# Altium PCB MotorPID.PcbDoc
Units mm, origin at the board's own origin, x right, y up, seen from the top; angles counter-clockwise.
Board outline 120.07 x 68.44 mm, 2 copper layers (Top Layer, Bottom Layer), stack 1.571 mm thick; 18 components, 15 nets, 88 pads, 13 vias.
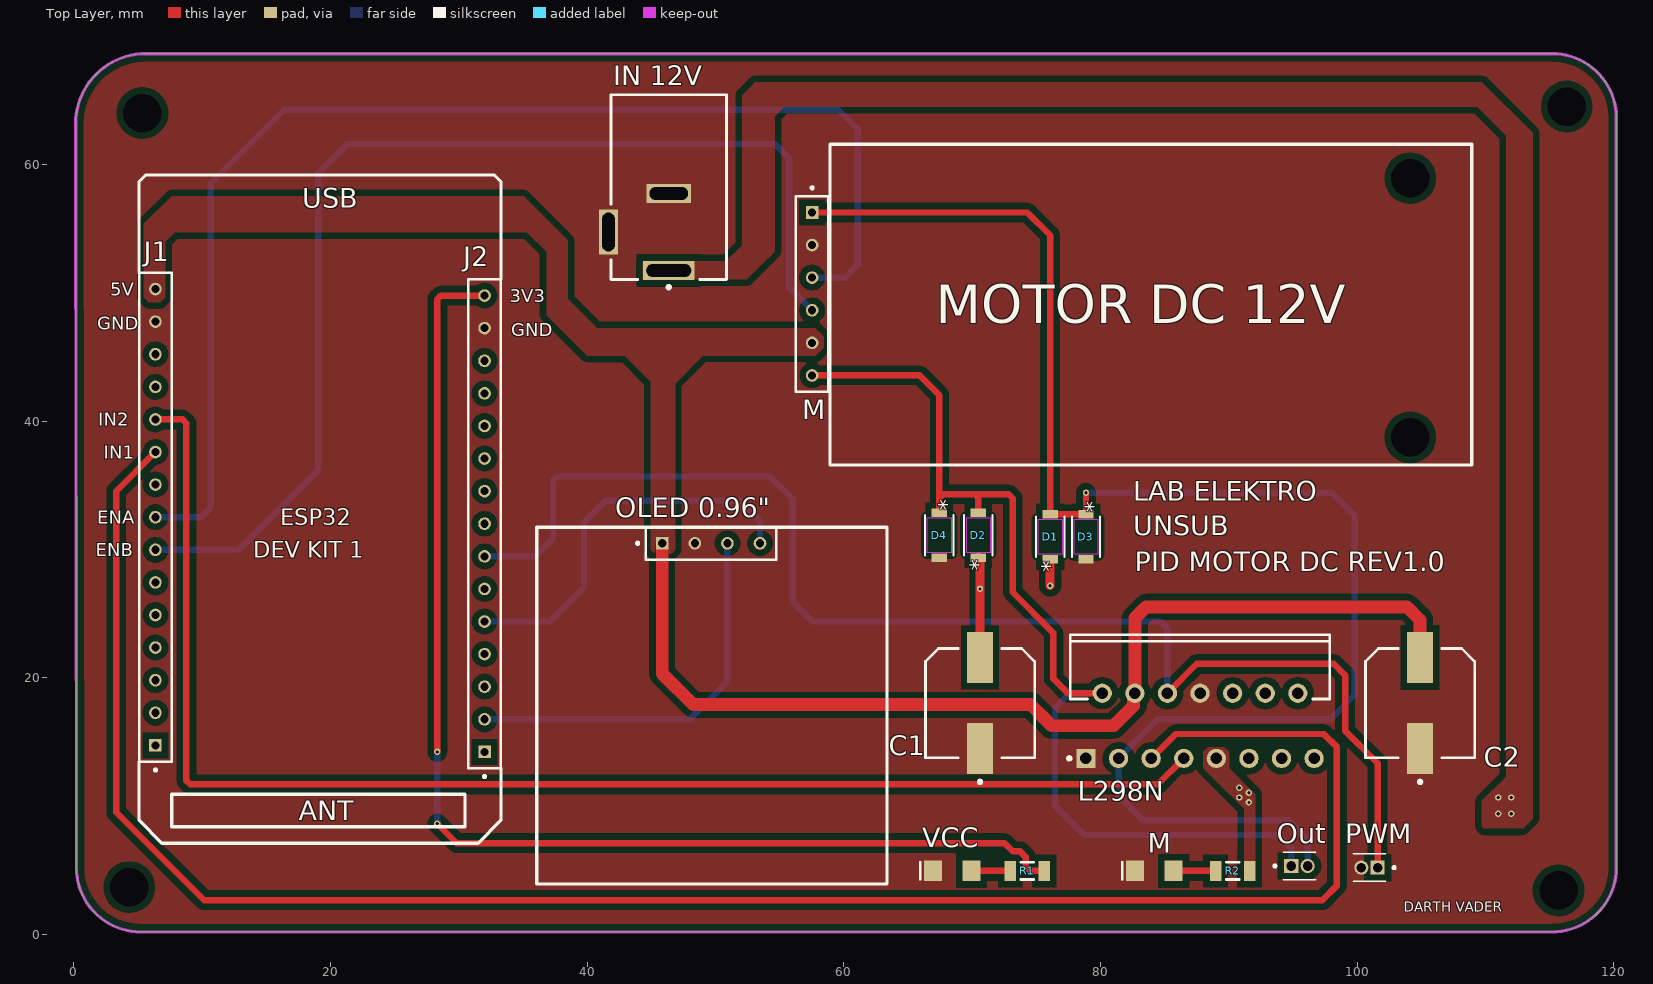
[diagram p0: Top Layer view]
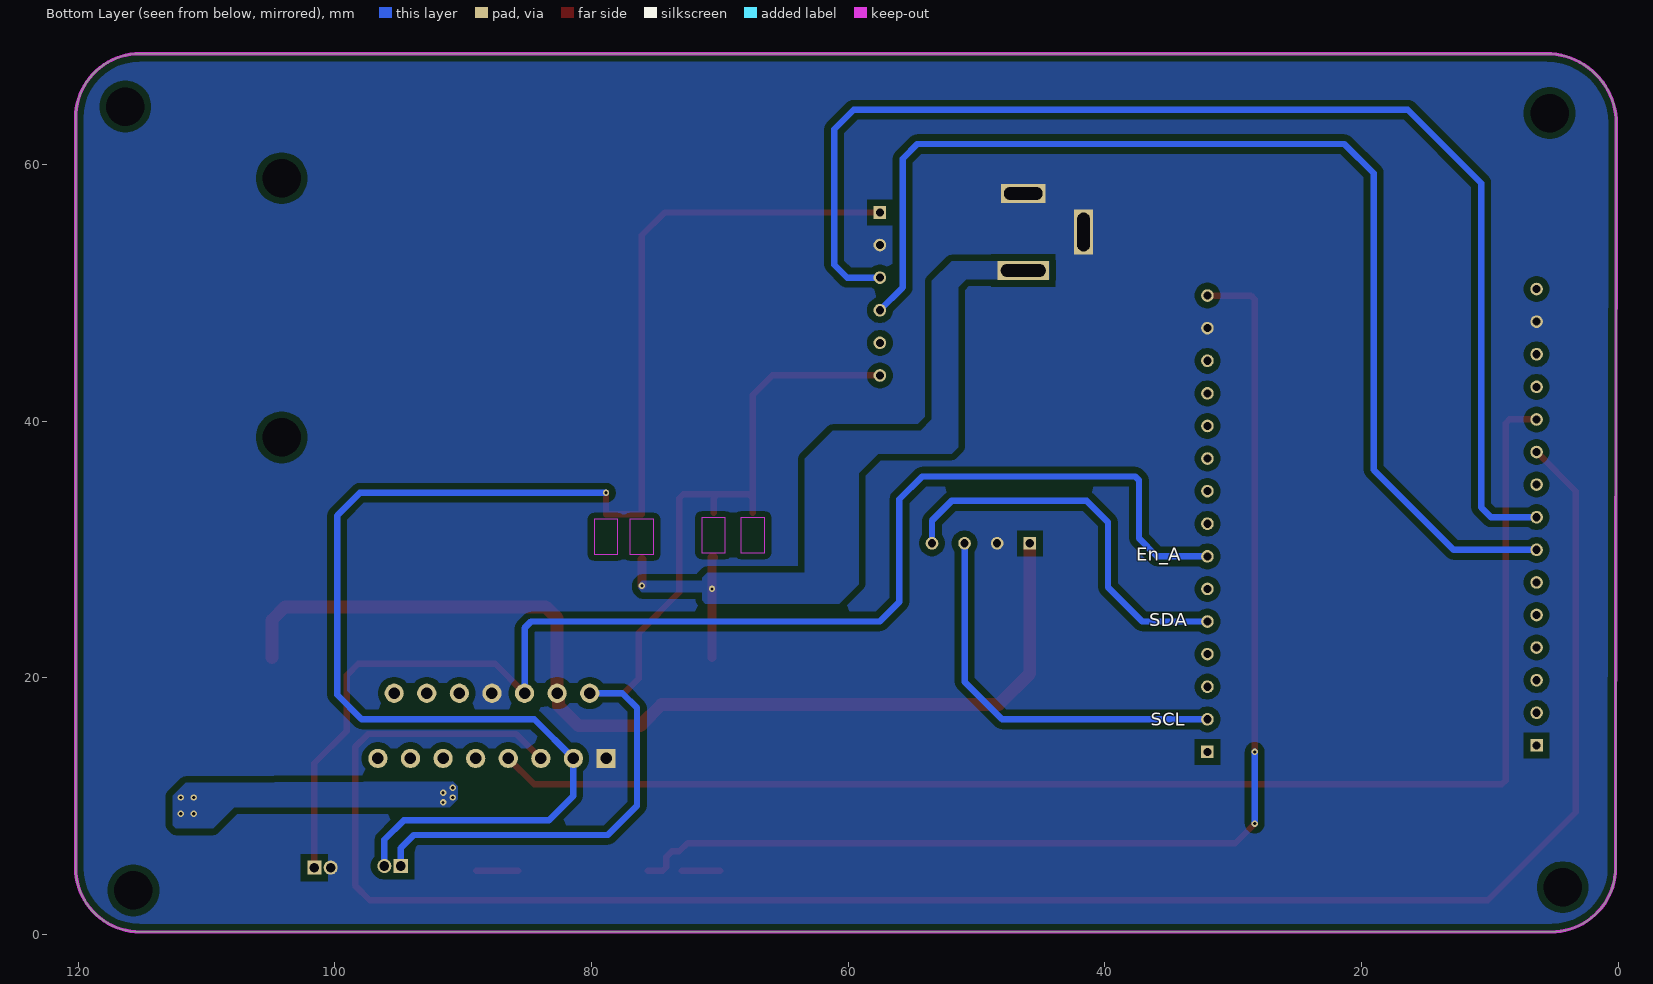
[diagram p1: Bottom Layer view, seen from below]
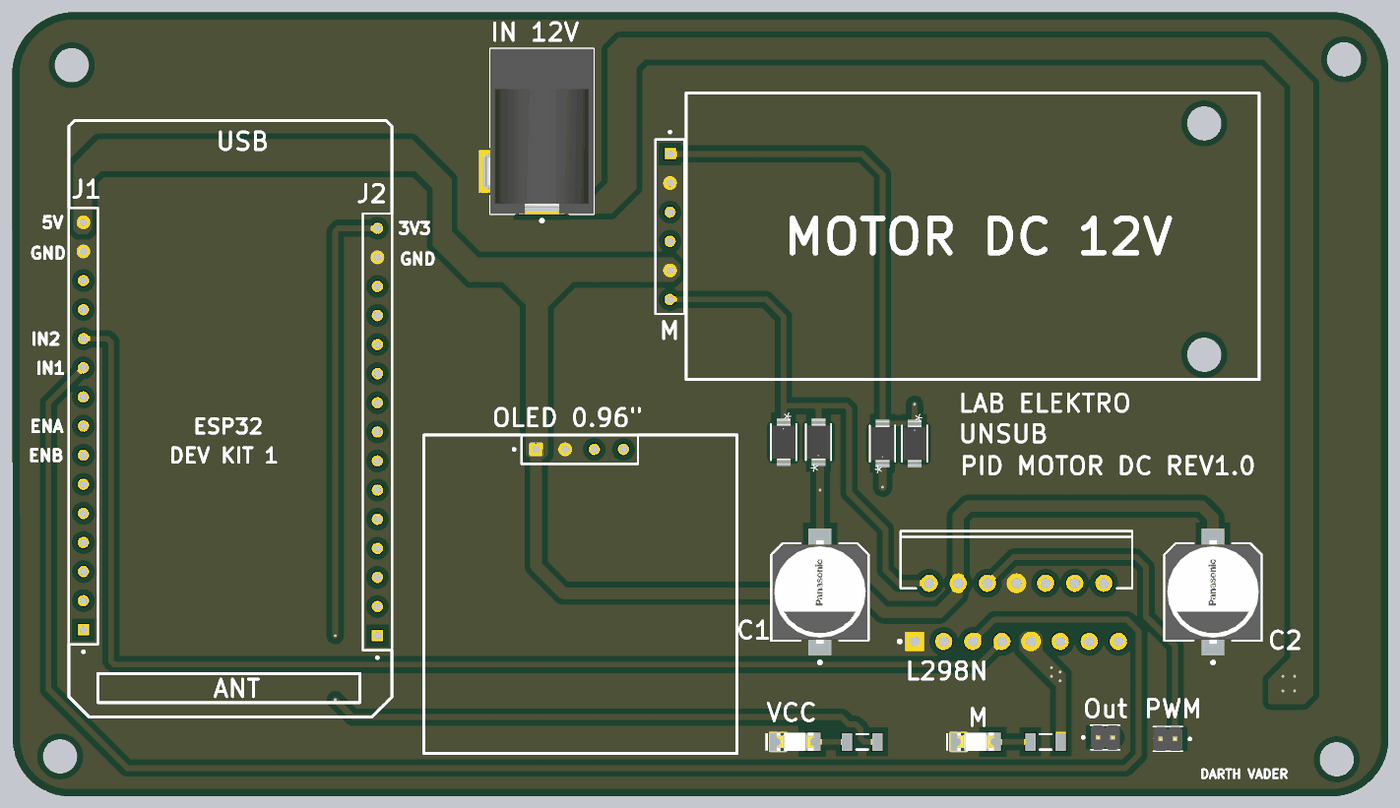
[diagram p2: 3D render of the assembled board from above, using the file's embedded part models]

## Layer stack, top to bottom
Top Solder: solder mask 0.0102, Solder Resist, Dk 3.5
Top Layer: signal copper 0.0356
Dielectric 1: dielectric 1.5, FR-4, Dk 4.8
Bottom Layer: signal copper 0.0356
Bottom Solder: solder mask 0.0102, Solder Resist, Dk 3.5

## Board outline
5.207,0.196 cw(c5.207,5.207) 0.196,5.207 0.135,63.171 cw(c5.602,63.171) 5.602,68.638 115.189,68.638 cw(c115.189,63.627) 120.2,63.627 120.2,5.207 cw(c115.189,5.207) 115.189,0.196

## Design rules (kind name [scope] priority, off if disabled: settings)
Clearance [All] p1: gap=0.5 ignorepadtopadclearanceinfootprint=FALSE
MinimumSolderMaskSliver [All] p1: minsoldermaskwidth=0.025
PolygonConnect [All] p1: connectstyle=Direct reliefconductorwidth=0.254 reliefentries=4 polygonreliefangle="90 Angle" airgapwidth=0.254
RoutingVias [All] p1: holewidth=0.2 width=0.3 viastyle="Through Hole" minholewidth=0.2 minwidth=0.3 maxholewidth=0.711 maxwidth=1.27
SilkToSilkClearance [All] p1: silktosilkclearance=0.025
SilkToSolderMaskClearance [IsPad] p1: minsilkscreentomaskgap=0.025 clearancetoexposedcopper=TRUE
SolderMaskExpansion [All] p1: expansion=0.102 istentingtop=FALSE
Width [All] p1: maxlimit=1 minlimit=0.254 preferedwidth=0.3
27 further rules are at their usual default settings.

## Classes and differential pairs
component class MotorPID: C1 C2 D1 D2 D3 D4 "IN 12V" J1 J2 L298N "M D" "OLED 0.96\"" PWM R1 R2 VCC

## Components (designator, comment, footprint, x,y, rotation, side; value= is the part's Value field where it differs from the comment)
C1 "220uF/35V" FP-FKF-MFG 70.612,18.034 r90 top
C2 "220uF/35V" FP-FKF-MFG 104.902,18.034 r90 top
D1 "1N4007FL" CR_SOD-123FL_SME-L 76.073,30.988 r90 top
D2 "1N4007FL" CR_SOD-123FL_SME-L 70.485,31.115 r90 top
D3 "1N4007FL" CR_SOD-123FL_SME-L 78.867,30.988 r270 top
D4 "1N4007FL" CR_SOD-123FL_SME-L 67.437,31.115 r270 top
"IN 12V" "PJ-002A" CUI-PJ-002A_V 46.355,54.737 r90 top (schematic designator J5)
J1 "ESP32 KIT 1 Pin" SAMTEC_TS-115-T-A 6.35,32.512 r90 top
J2 "TS-115-T-A" SAMTEC_TS-115-T-A 32.004,32.004 r90 top
L298N "L298N" STM-FM-15 87.757,16.256 r90 top (schematic designator U1)
M "M Pin" SAMTEC_TS-106-G-AA 57.531,49.911 r270 top (schematic designator J6)
M "Motor" WL-SMCW_1206_150120xx75000 84.201,4.953 r0 top (schematic designator D6)
"OLED 0.96\"" "TS-104-G-AA" SAMTEC_TS-104-G-AA 49.657,30.48 r0 top (schematic designator J3)
Out "TP PWM" SULLINS_GRPB021VWVN-RC 95.504,5.334 r0 top (schematic designator J7)
PWM "TP PWM" SULLINS_GRPB021VWVN-RC 100.965,5.207 r180 top (schematic designator J4)
R1 "330 Ohm" RESC3216X70X50LL05T20 74.295,4.953 r0 top
R2 "1.2k Ohm" RESC3216X70X50LL05T20 90.297,4.953 r0 top
VCC "VCC" WL-SMCW_1206_150120xx75000 68.453,4.953 r0 top (schematic designator D5)

## Footprints (in the part's own frame and the unit in brackets; to place one, negate y for a bottom-side part, rotate by r counter-clockwise, add the part's x,y. Pads: shape width x height; smd on the part's side, far side on the other; paste and mask are expansions set on the pad)
CR_SOD-123FL_SME-L [mil]
  rect 26x47 smd paste+0 mask+0: 1(-69,0) 2(69,0)
  Keep-Out Layer region: -54,-36.5 -54,36.5 54,36.5 54,-36.5
  silkscreen extent -62,-44 62,44, body extent -76,-39 76,39, height 55
CUI-PJ-002A_V [mm] "THD, 3-Leads, Body 14.4x9mm, Height 11mm"
  rect 1.5x4 hole 1 slot 3.5 at 90 deg: 1(-3,0)
  rect 1.5x3.5 hole 1 slot 3 at 90 deg: 2(3,0)
  rect 3.5x1.5 hole 1 slot 3 at 0 deg: 3(0,4.7)
  silkscreen extent -4.42,-4.5 10.7,4.5, body extent -3.7,-4.5 10.7,4.9, height 11
FP-FKF-MFG [mm]
  rect 4x2 smd paste+0 mask+0: 1(-3.55,0) 2(3.55,0)
  silkscreen extent -6.27,-4.25 4.25,4.25, body extent -5.8,-4.5 5.8,4.5, height 0.25
RESC3216X70X50LL05T20 [mm] "Chip Resistor, 2-Leads, Body 3.20x1.60mm, IPC High Density"
  rect 0.9x1.55 smd: 1(-1.325,0) 2(1.325,0)
  silkscreen extent -0.5,-0.67 0.5,0.67, body extent -1.63,-0.82 1.62,0.82, height 0.7
SAMTEC_TS-104-G-AA [mm]
  rect 0.985x0.985 hole 0.635: 01(-3.81,0)
  round 0.985 hole 0.635: 02(-1.27,0) 03(1.27,0) 04(3.81,0)
  silkscreen extent -5.83,-1.27 5.08,1.27
SAMTEC_TS-106-G-AA [mm]
  rect 0.985x0.985 / inner round 0.985 / far side rect 0.985x0.985 hole 0.635: 01(-6.35,0)
  round 0.985 hole 0.635: 02(-3.81,0) 03(-1.27,0) 04(1.27,0) 05(3.81,0) 06(6.35,0)
  silkscreen extent -8.37,-1.27 7.62,1.27
SAMTEC_TS-115-T-A [mm]
  rect 0.985x0.985 / inner round 0.985 / far side rect 0.985x0.985 hole 0.635: 01(-17.78,0)
  round 0.985 hole 0.635: 02(-15.24,0) 03(-12.7,0) 04(-10.16,0) 05(-7.62,0) 06(-5.08,0) 07(-2.54,0) 08(0,0) 09(2.54,0) 10(5.08,0) 11(7.62,0) 12(10.16,0) 13(12.7,0) 14(15.24,0) 15(17.78,0)
  silkscreen extent -19.8,-1.27 19.05,1.27
STM-FM-15 [mm] "FM, 15-Leads, Body 20.2x5mm, Pitch 1.27mm"
  rect 1.5x1.5 hole 0.9: 1(-2.54,8.89)
  round 1.5 hole 0.9: 2(2.54,7.62) 3(-2.54,6.35) 4(2.54,5.08) 5(-2.54,3.81) 6(2.54,2.54) 7(-2.54,1.27) 8(2.54,0) 9(-2.54,-1.27) 10(2.54,-2.54) 11(-2.54,-3.81) 12(2.54,-5.08) 13(-2.54,-6.35) 14(2.54,-7.62) 15(-2.54,-8.89)
  silkscreen extent -2.66,-10.1 7.09,10.31, body extent -2.8,-10.1 7.09,10.1, height 21
SULLINS_GRPB021VWVN-RC [mm]
  rect 1.1x1.1 / inner round 1.1 / far side rect 1.1x1.1 hole 0.75: 01(-0.635,0)
  round 1.1 hole 0.75: 02(0.635,0)
  silkscreen extent -2.02,-1.07 1.27,1.07, body extent -1.27,-1.07 1.27,1.07, height 4.04
WL-SMCW_1206_150120xx75000 [mm] "SMD Mono-color Chip LED, body 3.2x1.6mm"
  rect 1.4x1.6 smd: 1(-1.5,0) 2(1.5,0)
  silkscreen extent -2.6,-0.75 -2.4,0.75, body extent -1.6,-0.8 1.6,0.8, height 0.68

## Part data
C1 C2: library part CMP-05427-000085-1, "CAP ALUM 220UF 20% 35V SMD", Capacitance=220uF, Case/Package=Radial, Dielectric Material=Aluminium, ESR (Equivalent Series Resistance)=160mR, Leakage Current=3uA, Max Operating Temperature=105°C, Min Operating Temperature=-55°C, Package Quantity=1, Ripple Current=600mA, Tolerance=20%, Voltage=35V, Construction=Cylindrical, Contact Plating=Tin, Diameter=8mm, Height=10.2mm, Height - Seated (Max)=0.402inch, Impedance=160mR, Lead Free="Lead Free", Length=10.2mm, Life (Hours)=2000Hour, Material=Aluminium, Mount="Surface Mount", Number of Pins=2, Packaging="Tape and Reel", Radiation Hardening=No, REACH SVHC="No SVHC", Ripple Current (AC)=600mA, RoHS Compliant=Yes, Series=FK, Size=10.2mm, Termination=SMD/SMT, Voltage Rating=35V, Voltage Rating (DC)=35V, Width=10mm
D1 D2 D3 D4: "No Description Available", Mfr_Name="SMC Diode Solutions"
"IN 12V": library part CMP-2000-06895-2, "Through Hole Right Angle DC Power Jack, 2.5 A, 2 mm Center Pin, 3 Position, -25 to 85 degC, RoHS, Bulk", Current Rating=2.5A, Flammability Rating=UL94V-0, Insulation Resistance=50MOhms, Manufacturer=CUIInc., Operating Temperature Range=-25Cto+85C, Package Description="3-Pin Through Hole Device, Body 14.4 x 9 mm, Height 11 mm", Voltage Rating=24V, Brand=CUI, Connector Type=DCPowerJack, Contact Gender=Male, Contact Material=Copper, Contact Plating=Nickel, Datasheet URL=http://www.cui.com/product/resource/pj-002a.pdf, Datasheet Version="Rev. 1.03, 04/2016", Factory Pack Quantity=500, Housing Material=PolybutyleneTerephthalate(PBT), Inside Contact Diameter=2mm, Manufacturer URL=http://www.cui.com/, Mounting Angle=Right, Mounting Style=ThroughHole, Mounting Technology=ThroughHole, Outside Contact Diameter=6.5mm, Package Reference=PJ-002A, Product=Jacks, Product Category=DCPowerConnectors, RoHS=True, Termination Style=ThroughHole
J1: library part TS-115-T-A, Package=None, Availability=Unavailable, MF="Samtec Inc.", MP=TS-115-T-A, Price=None
J2 "OLED 0.96\"": Package=None, Availability=Unavailable, MF="Samtec Inc.", Price=None
  J2: MP=TS-115-T-A
  "OLED 0.96\"": MP=TS-104-G-AA
L298N: library part CMP-2000-06526-1, "Dual Full-Bridge Driver, 4.8 to 46 V, -40 to 150 degC, 15-Pin FM (MW 15L), RoHS, Tube", Driver Case Style=Multiwatt, Manufacturer=STMicroelectronics, Operating Temperature Max=130°C, Operating Temperature Min=-25°C, Output Current=2A, Output Voltage=46V, Package Description="15-Pin Flange Mount, Body 5 x 19.6 mm, Pitch 1.27 mm", Package Reference=FM-15, PartNumber=L298, Supply Voltage Max=7V, Supply Voltage Min=4.5V, Automotive Qualification Standard=-, Datasheet URL=https://datasheet.ciiva.com/15109/getdatasheetpartid-50682-15109332.pdf, Datasheet Version=01/2000, Manufacturer URL=http://www.st.com/, Motor Type=FullBridge, Mounting Technology=ThroughHole, MSL=-, No. of Outputs=4Outputs, No. of Pins=15Pins, Packaging=Each, Product Range=-, SVHC=NoSVHC(17-Dec-2015)
M: library part TS-106-G-AA, "Conn Unshrouded Header HDR 6 POS 2.54mm Solder ST Thru-Hole Tube", Package=None, Availability="In Stock", Check_prices=https://www.snapeda.com/parts/TS-106-G-AA/Samtec/view-part/?ref=eda, MF=Samtec, MP=TS-106-G-AA, Price=None, Purchase-URL=https://pricing.snapeda.com/search/part/TS-106-G-AA/?ref=eda, SnapEDA_Link=https://www.snapeda.com/parts/TS-106-G-AA/Samtec/view-part/?ref=snap
M VCC: library part CMP-1426-00014-4, "WL-SMCW SMT Mono-Color Chip LED Waterclear 1206", Case Code (Imperial)=1206, Case Code (Metric)=3216, Color=Green, Forward Current=100mA, Forward Voltage=3.2V, Max Junction Temperature (Tj)=95°C, Max Operating Temperature=85°C, Max Reverse Voltage (DC)=5V, Min Operating Temperature=-40°C, Power Dissipation=105mW, Test Current=20mA, Case/Package=1206, Dominant Wavelength=525nm, Height=680µm, Length=3.2mm, Lens Style="Clear, Rectangular", Luminous Intensity=450mcd, Mount="Surface Mount", Packaging="Tape and Reel", Peak Wavelength=515nm, REACH SVHC=Unknown, Reverse Voltage=5V, RoHS=Compliant, Viewing Angle=140°, Wavelength=525nm, Width=1.6mm
Out PWM: library part GRPB021VWVN-RC, Package=None, Availability=Unavailable, MP=GRPB021VWVN-RC, Price=None
R1 R2: library part CMP-2003-00017-1, Manufacturer=Panasonic, Part Number=ERJ-8ENF1001V

## Free pads (board coordinates)
  round 1.524 hole 3 unplated: 1(5.334,64.008) 2(4.318,3.683) 3(104.14,38.735) 3(104.14,58.928) 3(116.332,64.516) 4(115.697,3.429)

## Via types
v1: diameter 0.5, hole 0.254, Top Layer to Bottom Layer, tented both sides, 13 vias

## Nets (pads, with @x,y where several pads share a name; then routed paths per layer and width w, separated by ;. In a path a pad name is that pad's centre, name@x,y a point inside that pad or via, vN(x,y) a via of type N, cw(c..) or ccw(c..) an arc to the next point about the centre after c; other vN are vias at no path point)
+5: "OLED 0.96\".01" C2.2 J1.15 L298N.4 M.05 | length 82
  Top Layer w1: 45.847,30.48 45.847,20.32 48.26,17.907 74.549,17.907 76.2,16.256 81.015,16.256 82.581,17.822 82.581,18.7 L298N.4 82.677,24.638 83.566,25.527 103.886,25.527 104.902,24.511 C2.2
+12: "IN 12V.1" C1.2 D1.1 D2.1 L298N.9 R2.2 | length 10
  Top Layer w0.7: D2.1 70.592,29.362 70.612,29.343 v1(70.612,26.924) C1.2 ; v1(76.073,27.178) D1.1
  other v1: 110.998,9.398 112.014,9.398 91.567,10.287 90.805,10.668 110.998,10.668 112.014,10.668 91.567,11.049 90.805,11.43
En_A: J2.07 L298N.6 PWM.01 | length 104.3
  Top Layer w0.5: L298N.6 87.503,21.082 98.171,21.082 99.06,20.193 99.06,15.875 101.6,13.335 PWM.01
  Bottom Layer w0.5: J2.07 35.941,29.464 37.338,30.861 37.338,35.394 37.631,35.687 54.229,35.687 56.007,33.909 56.007,25.908 57.531,24.384 84.709,24.384 85.217,23.876 L298N.6
ENC_A: J1.08 M.03 | length 97.8
  Bottom Layer w0.5: J1.08 9.906,32.512 10.668,33.274 10.668,58.547 16.383,64.262 59.563,64.262 61.087,62.738 61.087,52.197 60.071,51.181 M.03
ENC_B: J1.07 M.04 | length 89.1
  Bottom Layer w0.5: J1.07 12.827,29.972 19.05,36.195 19.05,59.309 21.336,61.595 54.61,61.595 55.753,60.452 55.753,50.419 M.04
GND: "IN 12V.2" "IN 12V.3" "OLED 0.96\".02" C1.1 C2.1 D3.2 D4.2 J1.14 J2.14 L298N.1 L298N.8 M.1 M.02 PWM.02 VCC.1
IN1: J1.10 L298N.5 | length 154.2
  Top Layer w0.5: J1.10 3.302,34.544 3.302,9.525 10.16,2.667 97.282,2.667 98.425,3.81 98.425,14.605 97.409,15.621 85.852,15.621 L298N.5
IN2: J1.11 L298N.7 | length 109.1
  Top Layer w0.5: J1.11 8.47,40.132 8.763,39.839 8.763,11.989 9.056,11.696 84.467,11.696 L298N.7
M+: D2.2 D4.1 L298N.2 M.06 Out.01 | length 79.8
  Top Layer w0.5: M.06 65.913,43.561 67.437,42.037 67.437,33.997 ; D4.1 67.437,33.997 ; D2.2 70.485,33.997 70.192,34.29 ; L298N.2 77.47,18.796 76.327,19.939 76.327,23.495 73.152,26.67 73.152,33.997 72.859,34.29 70.192,34.29 ; 67.437,33.997 67.73,34.29 70.192,34.29
  Bottom Layer w0.5: L298N.2 77.597,18.796 76.454,17.653 76.454,10.033 78.74,7.747 93.853,7.747 94.869,6.731 Out.01
M-: D1.2 D3.1 L298N.3 M.01 Out.02 | length 122.7
  Top Layer w0.5: M.01 74.295,56.261 76.073,54.483 D1.2 D3.1 v1(78.867,34.417)
  Bottom Layer w0.5: v1(78.867,34.417) 98.044,34.417 99.822,32.639 99.822,18.669 97.917,16.764 84.455,16.764 L298N.3 81.407,10.795 83.312,8.89 94.615,8.89 96.139,7.366 Out.02
NetD5_2: R1.1 VCC.2 | length 3
  Top Layer w0.5: VCC.2 R1.1
NetD6_2: M.2 R2.1 | length 3.3
  Top Layer w0.5: M.2 R2.1
SCL: "OLED 0.96\".03" J2.02 | length 30.9
  Bottom Layer w0.5: J2.02 48.006,16.764 50.927,19.685 50.927,30.48
SDA: "OLED 0.96\".04" J2.05 | length 30.7
  Bottom Layer w0.5: J2.05 37.084,24.384 39.751,27.051 39.751,32.131 41.402,33.782 51.943,33.782 53.467,32.258 53.467,30.48
VCC: J2.15 R1.2 | length 93.9
  Top Layer w0.5: v1(28.321,8.636) 29.845,7.112 72.517,7.112 73.151,6.478 73.731,6.478 74.17,6.039 74.17,5.246 74.463,4.953 R1.2 ; v1(28.321,14.224) 28.321,49.491 28.614,49.784 J2.15
  Bottom Layer w0.5: v1(28.321,8.636) v1(28.321,14.224)
pads on no net: J1.01 J1.02 J1.03 J1.04 J1.05 J1.06 J1.09 J1.12 J1.13 J2.01 J2.03 J2.04 J2.06 J2.08 J2.09 J2.10 J2.11 J2.12 J2.13 L298N.10 L298N.11 L298N.12 L298N.13 L298N.14 L298N.15

## Polygon pours and split planes (outlines as drawn)
GND on Top Layer "GND_L01_P011" (solid, remove dead copper, pour order 11): -5.207,71.374 -5.334,71.247 -5.334,-5.461 126.873,-5.461 125.603,-4.191 125.603,79.121
+12 on Top Layer "+12_L01_P006" (solid, pour order 6): 44.323,52.451 44.323,51.054 52.451,51.054 54.61,53.213 54.61,63.754 55.372,64.516 109.347,64.516 111.633,62.23 111.633,12.319 109.728,10.414 109.728,8.382 109.855,8.255 112.903,8.255 113.665,9.017 113.665,62.484 109.728,66.421 53.086,66.421 52.07,65.405 52.07,53.721 50.8,52.451
+12 on Top Layer "+12_L01_P005" (solid, pour order 5): 88.392,14.605 88.011,14.224 88.011,12.954 89.027,11.938 91.186,9.779 91.186,4.191 92.075,4.191 92.075,10.922 90.043,12.954 90.043,14.224 89.662,14.605
+5 on Top Layer "+5_L01_P001" (solid, remove dead copper, pour order 1): 45.339,29.591 46.482,29.591 46.863,29.972 46.863,42.926 49.022,45.085 57.785,45.085 58.42,45.72 58.42,46.609 57.785,47.244 40.767,47.244 38.481,49.53 38.481,54.102 35.052,57.531 7.62,57.531 5.461,55.372 5.461,49.657 5.842,49.276 6.731,49.276 7.112,49.657 7.112,53.975 7.874,54.737 35.306,54.737 36.83,53.213 36.83,48.26 40.005,45.085 42.926,45.085 44.958,43.053 44.958,29.972
GND on Bottom Layer "GND_L02_P010" (solid, remove dead copper, pour order 10): -3.429,70.358 -3.429,-4.191 -4.699,-5.461 -4.445,-5.715 127.635,-5.715 127.635,77.597 127.508,77.724
+12 on Bottom Layer "+12_L02_P009" (solid, pour order 9): 70.739,27.559 76.073,27.559 76.327,27.305 76.327,26.924 76.073,26.67 70.231,26.67 70.231,27.305
+12 on Bottom Layer "+12_L02_P008" (solid, pour order 8): 44.323,52.451 44.323,51.054 50.8,51.054 51.435,50.419 51.435,37.973 51.943,37.465 57.658,37.465 59.182,35.941 59.182,27.305 60.706,25.781 71.12,25.781 71.374,26.035 71.374,27.813 70.993,28.194 63.373,28.194 63.373,37.084 61.214,39.243 54.356,39.243 53.467,40.132 53.467,50.927 51.943,52.451
+12 on Bottom Layer "+12_L02_P007" (solid, pour order 7): 90.805,11.938 90.424,11.557 90.424,10.541 91.059,9.906 107.823,9.906 109.474,8.255 112.395,8.255 112.649,8.509 112.649,10.795 111.633,11.811

## Keep-outs
Keep-Out Layer:
  the board outline again, w0.254

## Silkscreen, mask and mechanical layers (free items; w line width, h text height)
Top Overlay:
  lines w0.254: 5.08,13.462 5.08,8.89 6.858,7.112 31.496,7.112 33.274,8.89 33.274,12.954 ; 5.08,51.562 5.08,58.674 5.588,59.182 32.766,59.182 33.274,58.674 33.274,51.054 ; 7.62,8.382 30.48,8.382 30.48,10.922 7.62,10.922 7.62,8.382 ; 36.068,3.937 63.368,3.937 63.368,31.737 36.068,31.737 36.068,3.937 ; 58.928,36.576 108.928,36.576 108.928,61.576 58.928,61.576 58.928,36.576
  text "USB" at 17.78,56.642 h1.52
  text "5V" at 2.837,49.784 h1.02
  text "3V3" at 33.952,49.276 h1.02
  text "MOTOR DC 12V" at 67.175,47.617 h3
  text "GND" at 1.821,47.117 h1.02
  text "GND" at 34.079,46.609 h1.02
  text "IN2" at 1.905,39.624 h1.02
  text "IN1" at 2.329,37.084 h1.02
  text "LAB ELEKTRO" at 82.55,33.782 h1.52
  text "ENA" at 1.821,32.004 h1.02
  text "ESP32" at 16.088,31.877 h1.27
  text "UNSUB" at 82.55,31.115 h1.52
  text "ENB" at 1.694,29.464 h1.02
  text "DEV KIT 1" at 13.993,29.337 h1.27
  text "PID MOTOR DC REV1.0" at 82.677,28.321 h1.52
  text "ANT" at 17.526,8.89 h1.52
  text "DARTH VADER" at 103.632,1.778 h0.76
Bottom Overlay:
  text "En_A" at 37.549,29.125 h1.02
  text "SDA" at 36.533,24.003 h1.02
  text "SCL" at 36.406,16.256 h1.02

## Text inside footprints (layer, text, board x,y; h text height)
D1: Top 3D Body "*" at 76.708,29.477 h1.27 r90; Top Overlay "*" at 76.708,28.207 h1.27 r90
D2: Top 3D Body "*" at 71.12,29.604 h1.27 r90; Top Overlay "*" at 71.12,28.334 h1.27 r90
D3: Top 3D Body "*" at 78.232,32.499 h1.27 r270; Top Overlay "*" at 78.232,33.769 h1.27 r270
D4: Top 3D Body "*" at 66.802,32.626 h1.27 r270; Top Overlay "*" at 66.802,33.896 h1.27 r270